# Altium PCB PCB_PAD_MB_2021-08-01.pcbdoc
Units mil, origin at the board's own origin, x right, y up, seen from the top; angles counter-clockwise.
Board outline 4865 x 4900 mil, 2 copper layers (Top Layer, Bottom Layer); 99 components, 75 nets, 466 pads, 240 vias.
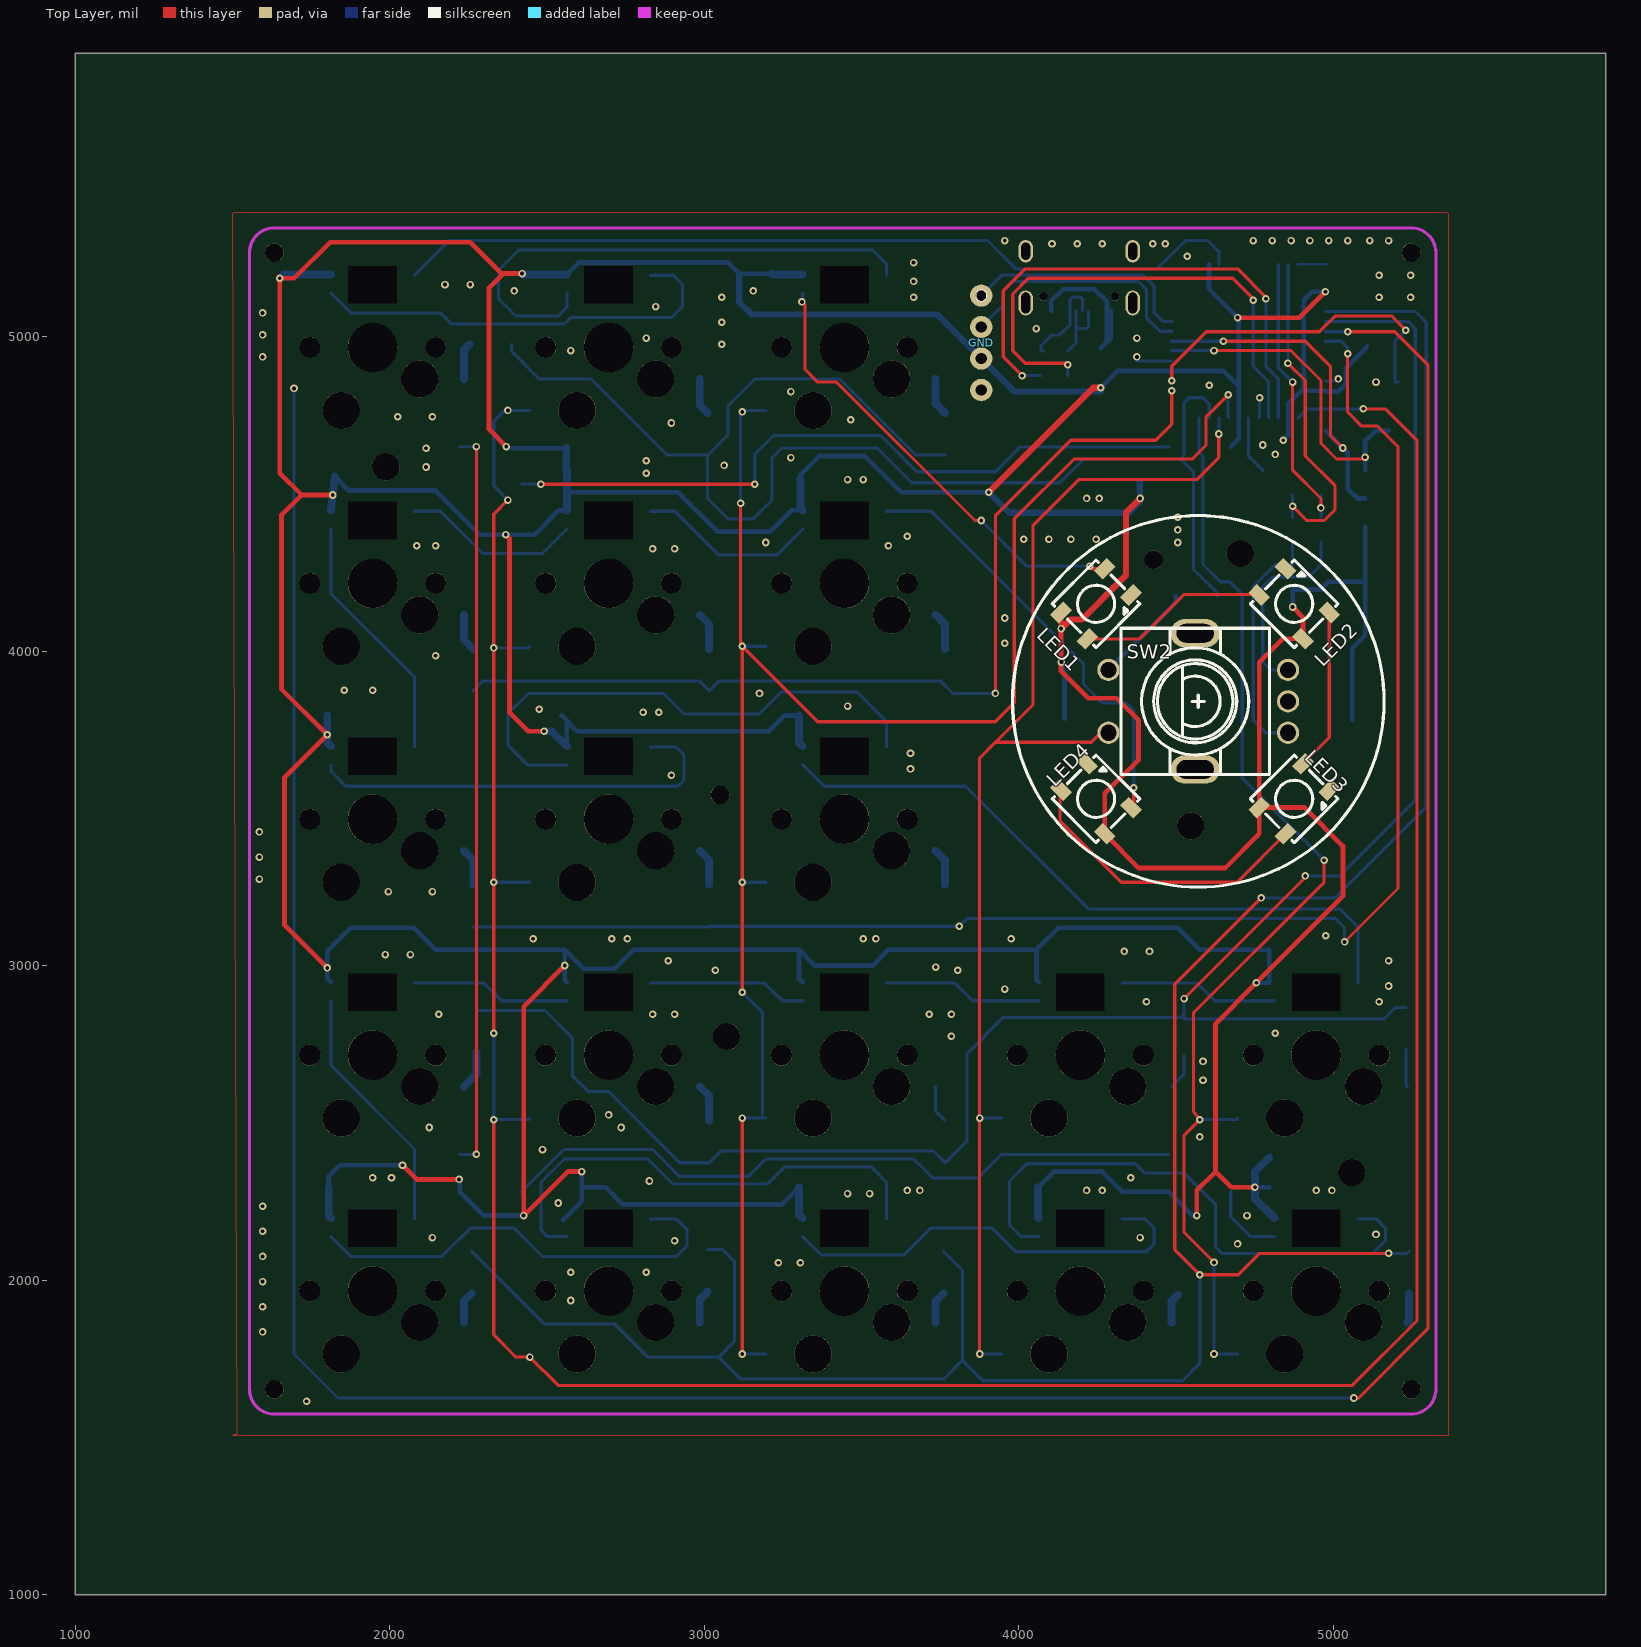
[diagram p0: Top Layer view]
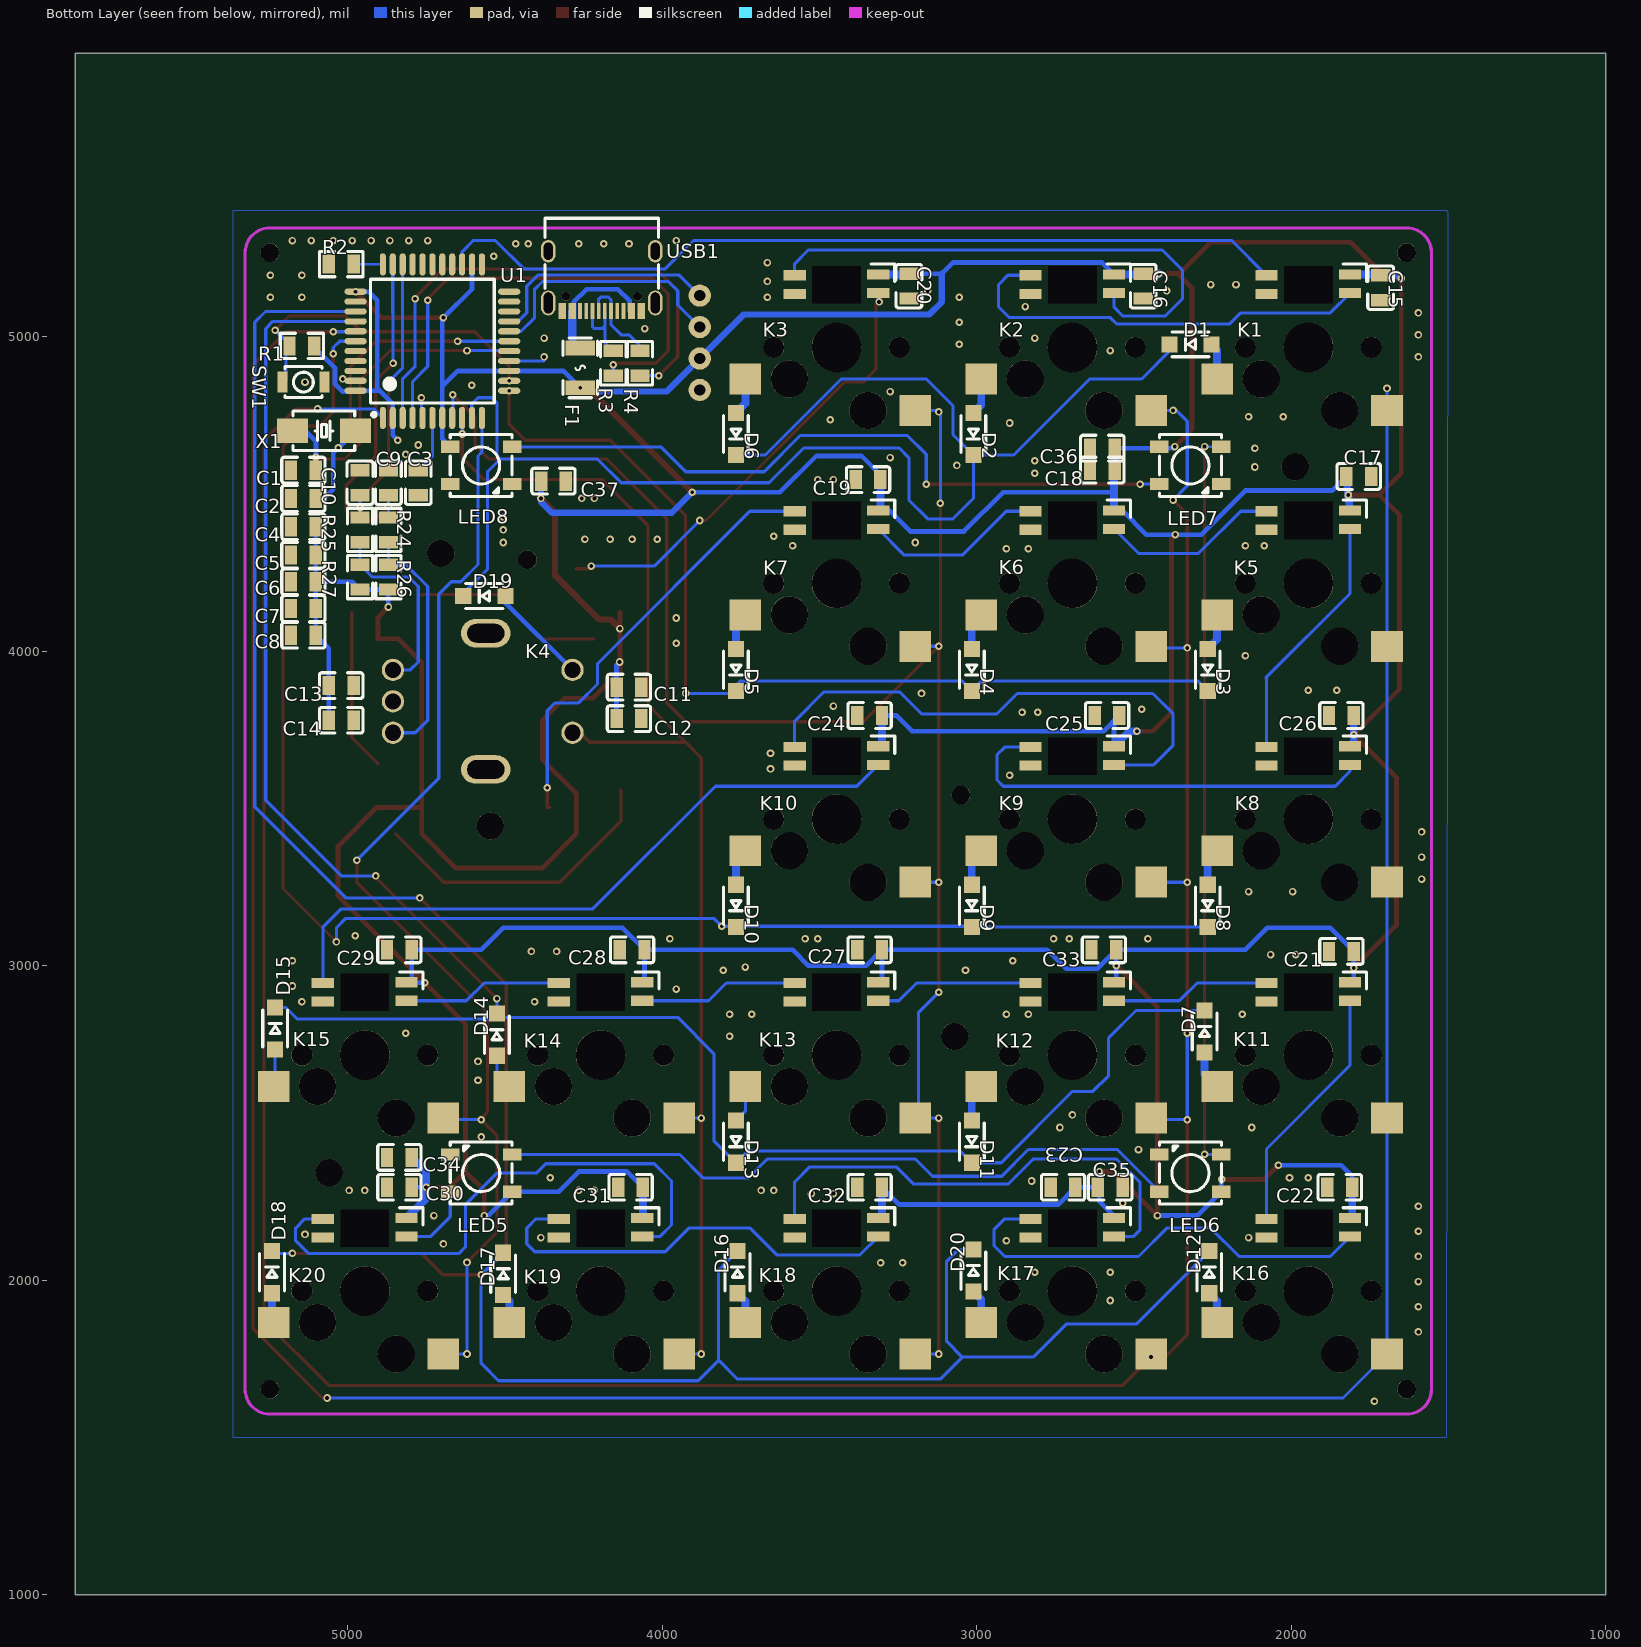
[diagram p1: Bottom Layer view, seen from below]

## Layer stack, top to bottom
Top Layer: signal copper (thickness not stored)
Dielectric: dielectric 12.6, FR-4, Dk 4.8
Bottom Layer: signal copper (thickness not stored)

## Board outline
5865,1000 1000,1000 1000,5900 5865,5900

## Components (designator, comment, footprint, x,y, rotation, side; value= is the part's Value field where it differs from the comment)
C1 "22pf" C0805 5140,4575 r0 bottom
C2 "22pf" C0805 5140,4485 r0 bottom
C3 "1u" C0805 4775,4535 r270 bottom
C4 "100nf" C0805 5140,4395 r0 bottom
C5 "100nf" C0805 5140,4305 r0 bottom
C6 "100nf" C0805 5140,4220 r0 bottom
C7 "100nf" C0805 5140,4135 r0 bottom
C8 "470nf" C0805 5140,4050 r0 bottom
C9 "10nf" C0805 4870,4535 r90 bottom
C10 "10nf" C0805 4960,4535 r90 bottom
C11 "0.1u" C0805 4105,3885 r0 bottom
C12 "0.1u" C0805 4105,3785 r0 bottom
C13 "0.1u" C0805 5020,3890 r0 bottom
C14 "0.1u" C0805 5020,3780 r0 bottom
C15 "0.1u" C0805 1715,5155 r90 bottom
C16 "0.1u" C0805 2470,5160 r90 bottom
C17 "0.1u" C0805 1785,4555 r0 bottom
C18 "0.1u" C0805 2600,4575 r180 bottom
C19 "0.1u" C0805 3345,4545 r180 bottom
C20 "0.1u" C0805 3215,5160 r90 bottom
C21 "0.1u" C0805 1840,3045 r180 bottom
C22 "0.1u" C0805 1845,2295 r180 bottom
C23 "0.1u" C0805 2725,2295 r180 bottom
C24 "0.1u" C0805 3340,3795 r180 bottom
C25 "0.1u" C0805 2585,3795 r180 bottom
C26 "0.1u" C0805 1840,3795 r180 bottom
C27 "0.1u" C0805 3340,3050 r180 bottom
C28 "0.1u" C0805 4095,3050 r180 bottom
C29 "0.1u" C0805 4835,3050 r180 bottom
C30 "0.1u" C0805 4835,2295 r180 bottom
C31 "0.1u" C0805 4100,2295 r180 bottom
C32 "0.1u" C0805 3340,2295 r180 bottom
C33 "0.1u" C0805 2595,3050 r180 bottom
C34 "0.1u" C0805 4835,2390 r180 bottom
C35 "0.1u" C0805 2575,2295 r0 bottom
C36 "0.1u" C0805 2600,4645 r180 bottom
C37 "0.1u" C0805 4345,4540 r0 bottom
D1 "1N4148W-C129216" SOD-123FL_L2.6-W1.6-LS3.4-RD 2320,4975 r180 bottom
D2 "1N4148W-C129216" SOD-123FL_L2.6-W1.6-LS3.4-RD 3010,4690 r90 bottom
D3 "1N4148W-C129216" SOD-123FL_L2.6-W1.6-LS3.4-RD 2265,3940 r90 bottom
D4 "1N4148W-C129216" SOD-123FL_L2.6-W1.6-LS3.4-RD 3015,3940 r90 bottom
D5 "1N4148W-C129216" SOD-123FL_L2.6-W1.6-LS3.4-RD 3765,3940 r90 bottom
D6 "1N4148W-C129216" SOD-123FL_L2.6-W1.6-LS3.4-RD 3765,4690 r90 bottom
D7 "1N4148W-C129216" SOD-123FL_L2.6-W1.6-LS3.4-RD 2275,2790 r270 bottom
D8 "1N4148W-C129216" SOD-123FL_L2.6-W1.6-LS3.4-RD 2265,3190 r90 bottom
D9 "1N4148W-C129216" SOD-123FL_L2.6-W1.6-LS3.4-RD 3015,3190 r90 bottom
D10 "1N4148W-C129216" SOD-123FL_L2.6-W1.6-LS3.4-RD 3765,3190 r90 bottom
D11 "1N4148W-C129216" SOD-123FL_L2.6-W1.6-LS3.4-RD 3015,2440 r90 bottom
D12 "1N4148W-C129216" SOD-123FL_L2.6-W1.6-LS3.4-RD 2260,2025 r270 bottom
D13 "1N4148W-C129216" SOD-123FL_L2.6-W1.6-LS3.4-RD 3765,2440 r90 bottom
D14 "1N4148W-C129216" SOD-123FL_L2.6-W1.6-LS3.4-RD 4525,2780 r270 bottom
D15 "1N4148W-C129216" SOD-123FL_L2.6-W1.6-LS3.4-RD 5230,2800 r270 bottom
D16 "1N4148W-C129216" SOD-123FL_L2.6-W1.6-LS3.4-RD 3760,2025 r270 bottom
D17 "1N4148W-C129216" SOD-123FL_L2.6-W1.6-LS3.4-RD 4505,2020 r270 bottom
D18 "1N4148W-C129216" SOD-123FL_L2.6-W1.6-LS3.4-RD 5240,2025 r270 bottom
D19 "1N4148W-C129216" SOD-123FL_L2.6-W1.6-LS3.4-RD 4565,4175 r180 bottom
D20 "1N4148W-C129216" SOD-123FL_L2.6-W1.6-LS3.4-RD 3010,2030 r270 bottom
F1 "SMD1206B200TF" F1206 4260,4900 r90 bottom
GND "A1WJUN_OLED-0.91" A1WJUN_OLED-0.91 3880,5130 r0 top
K1 "凯华KAILH热插拔底座 COPY" CHERRY_MX_热插拔_3528RGB(左入) 1945,4965 r0 top
K2 "凯华KAILH热插拔底座 COPY" CHERRY_MX_热插拔_3528RGB(左入) 2695,4965 r0 top
K3 "凯华KAILH热插拔底座 COPY" CHERRY_MX_热插拔_3528RGB(左入) 3445,4965 r0 top
K5 "凯华KAILH热插拔底座 COPY" CHERRY_MX_热插拔_3528RGB(左入) 1945,4215 r0 top
K6 "凯华KAILH热插拔底座 COPY" CHERRY_MX_热插拔_3528RGB(左入) 2695,4215 r0 top
K7 "凯华KAILH热插拔底座 COPY" CHERRY_MX_热插拔_3528RGB(左入) 3445,4215 r0 top
K8 "凯华KAILH热插拔底座 COPY" CHERRY_MX_热插拔_3528RGB(左入) 1945,3465 r0 top
K9 "凯华KAILH热插拔底座 COPY" CHERRY_MX_热插拔_3528RGB(左入) 2695,3465 r0 top
K10 "凯华KAILH热插拔底座 COPY" CHERRY_MX_热插拔_3528RGB(左入) 3445,3465 r0 top
K11 "凯华KAILH热插拔底座 COPY" CHERRY_MX_热插拔_3528RGB(左入) 1945,2715 r0 top
K12 "凯华KAILH热插拔底座 COPY" CHERRY_MX_热插拔_3528RGB(左入) 2695,2715 r0 top
K13 "凯华KAILH热插拔底座 COPY" CHERRY_MX_热插拔_3528RGB(左入) 3445,2715 r0 top
K14 "凯华KAILH热插拔底座 COPY" CHERRY_MX_热插拔_3528RGB(左入) 4195,2715 r0 top
K15 "凯华KAILH热插拔底座 COPY" CHERRY_MX_热插拔_3528RGB(左入) 4945,2715 r0 top
K16 "凯华KAILH热插拔底座 COPY" CHERRY_MX_热插拔_3528RGB(左入) 1945,1965 r0 top
K17 "凯华KAILH热插拔底座 COPY" CHERRY_MX_热插拔_3528RGB(左入) 2695,1965 r0 top
K18 "凯华KAILH热插拔底座 COPY" CHERRY_MX_热插拔_3528RGB(左入) 3445,1965 r0 top
K19 "凯华KAILH热插拔底座 COPY" CHERRY_MX_热插拔_3528RGB(左入) 4195,1965 r0 top
K20 "凯华KAILH热插拔底座 COPY" CHERRY_MX_热插拔_3528RGB(左入) 4945,1965 r0 top
LED1 "WS2812B" LED-SMD_4P-L5.0-W5.0-BL#1 4245,4150 r315 top
LED2 "WS2812B" LED-SMD_4P-L5.0-W5.0-BL#1 4875,4150 r45 top
LED3 "WS2812B" LED-SMD_4P-L5.0-W5.0-BL#1 4875,3530 r315 top
LED4 "WS2812B" LED-SMD_4P-L5.0-W5.0-BL#1 4245,3530 r45 top
LED5 "WS2812B" LED-SMD_4P-L5.0-W5.0-BL#2 4575,2340 r270 bottom
LED6 "WS2812B" LED-SMD_4P-L5.0-W5.0-BL#2 2320,2340 r270 bottom
LED7 "WS2812B" LED-SMD_4P-L5.0-W5.0-BL#2 2320,4590 r90 bottom
LED8 "WS2812B" LED-SMD_4P-L5.0-W5.0-BL#2 4575,4590 r90 bottom
R1 "10k" R0805 5145,4970 r0 bottom
R2 "1k" R0805 5020,5230 r180 bottom
R3 "22k" R0805 4155,4915 r270 bottom
R4 "22k" R0805 4070,4915 r270 bottom
R24 "10k" R0805 4870,4385 r90 bottom
R25 "10k" R0805 4960,4385 r90 bottom
R26 "10k" R0805 4870,4235 r90 bottom
R27 "10k" R0805 4960,4235 r270 bottom
SW1 "B3U-1000P" KEY-SMD_B3U-1000PM 5140,4855 r180 bottom
SW2 "K4" SW-TH_EC11E18244A5 4570,3840 r90 top
U1 "ATMEGA32U4-AU" QFP-44_L10.0-W10.0-P0.80-LS13.2-BL 4730,4985 r0 bottom
USB1 "KH-TYPE-C-16P-T" USB-C-SMD_KH-TYPE-C-16P 4191.53,5176.1 r180 bottom
X1 "16MHz" 5032 5075,4700 r180 bottom

## Footprints (in the part's own frame and the unit in brackets; to place one, negate y for a bottom-side part, rotate by r counter-clockwise, add the part's x,y. Pads: shape width x height; smd on the part's side, far side on the other; paste and mask are expansions set on the pad)
5032 [mm]
  rect 2.5x1.999 smd: 1(2.54,0) 2(-2.54,0)
  silkscreen extent -2.49,-1.6 2.49,1.6
A1WJUN_OLED-0.91 [mm]
  round 1.8 hole 0.91: 1(0,-7.62) 2(0,-5.08) 3(0,-2.54) 4(0,0)
  silkscreen extent -0.45,-0.45 0.45,0.45
C0805 [mm]
  rect 1x1.55 smd: 1(1,0) 2(-1,0)
  silkscreen extent -1.75,-1.04 1.75,1.04
CHERRY_MX_热插拔_3528RGB(左入) [mm]
  rect 1.8x0.82 smd far side: 1(3.385,4.33) 2(3.385,5.83) 3(-3.363,5.894) 4(-3.363,4.394)
  rect 2.55x2.5 smd far side: 5(-6.35,-5.08) 6(7.366,-2.54)
  round 1.7 hole 1.7 unplated: ""(-5.08,0) ""(5.08,0)
  round 3 hole 3 unplated: ""(-2.54,-5.08) ""(3.81,-2.54)
  round 4 hole 4 unplated: ""(0,0)
  Multi-Layer board cut-out: -1.95,6.58 1.95,6.58 1.95,3.58 -1.95,3.58
F1206 [mm]
  rect 1.2x2.4 smd: 1(1.6,0) 2(-1.6,0)
  silkscreen extent -2.41,-1.4 2.41,1.4
KEY-SMD_B3U-1000PM [mm]
  rect 0.8x1.7 smd: 1(1.7,0) 2(-1.7,0)
  silkscreen extent -1.5,-1.25 1.5,1.25
LED-SMD_4P-L5.0-W5.0-BL#1 [mm]
  rect 1x1.5 smd: 1(-1.5,-2.5) 2(1.5,-2.5) 3(1.5,2.5) 4(-1.5,2.5)
  silkscreen extent -2.5,-2.5 2.5,2.5
LED-SMD_4P-L5.0-W5.0-BL#2 [mm]
  rect 1x1.5 smd: 1(1.5,2.5) 2(-1.5,2.5) 3(-1.5,-2.5) 4(1.5,-2.5)
  silkscreen extent -2.5,-2.5 2.5,2.5
QFP-44_L10.0-W10.0-P0.80-LS13.2-BL [mm]
  oval 0.5x1.8 smd: 1(4,6.2) 2(3.2,6.2) 3(2.4,6.2) 4(1.6,6.2) 5(0.8,6.2) 6(0,6.2) 7(-0.8,6.2) 8(-1.6,6.2) 9(-2.4,6.2) 10(-3.2,6.2) 11(-4,6.2) 23(-4,-6.2) 24(-3.2,-6.2) 25(-2.4,-6.2) 26(-1.6,-6.2) 27(-0.8,-6.2) 28(0,-6.2) 29(0.8,-6.2) 30(1.6,-6.2) 31(2.4,-6.2) 32(3.2,-6.2) 33(4,-6.2)
  oval 1.8x0.5 smd: 12(-6.2,4) 13(-6.2,3.2) 14(-6.2,2.4) 15(-6.2,1.6) 16(-6.2,0.8) 17(-6.2,0) 18(-6.2,-0.8) 19(-6.2,-1.6) 20(-6.2,-2.4) 21(-6.2,-3.2) 22(-6.2,-4) 34(6.2,-4) 35(6.2,-3.2) 36(6.2,-2.4) 37(6.2,-1.6) 38(6.2,-0.8) 39(6.2,0) 40(6.2,0.8) 41(6.2,1.6) 42(6.2,2.4) 43(6.2,3.2) 44(6.2,4)
  silkscreen extent -5,-5 5,6.08
R0805 [mm]
  rect 1x1.55 smd: 1(1,0) 2(-1,0)
  silkscreen extent -1.75,-1.02 1.75,1.02
SOD-123FL_L2.6-W1.6-LS3.4-RD [mm]
  rect 1.3x1.3 smd: 1(-1.7,0) 2(1.7,0)
  silkscreen extent -1.5,-1 1.5,1
SW-TH_EC11E18244A5 [mm]
  oval 2.3x4 hole 1.5 slot 3 at 90 deg: 6(5.5,0.25) 7(-5.5,0.25)
  round 1.8 hole 1.3: A(-2.54,-7.25) B(2.54,-7.25) C(0,-7.25) D(-2.54,7.25) E(2.54,7.25)
  silkscreen extent -5.9,-5.75 5.9,6.25
USB-C-SMD_KH-TYPE-C-16P [mm]
  oval 1.2x2 hole 0.7 slot 1.7 at 90 deg: 1(4.32,-1.765) 2(-4.32,-1.765)
  oval 1.2x1.8 hole 0.7 slot 1.4 at 90 deg: 3(4.32,2.415) 4(-4.32,2.415)
  rect 0.3x1.3 smd: A1(3.35,-2.415) A4(2.55,-2.415) A5(1.25,-2.415) A6(0.25,-2.415) A7(-0.25,-2.415) A8(-1.25,-2.415) A9(-2.55,-2.415) A12(-3.35,-2.415) B1(-3.05,-2.415) B4(-2.25,-2.415) B5(-1.75,-2.415) B6(-0.75,-2.415) B7(0.75,-2.415) B8(1.75,-2.415) B9(2.25,-2.415) B12(3.05,-2.415)
  round 0.7 hole 0.7 unplated: ""(-2.89,-1.235) ""(2.89,-1.235)
  silkscreen extent -4.57,-0.57 4.57,5.08

## Free pads (board coordinates)
  rect 59.05x39.37 smd far side: 1(1695,4765)
  round 59.06 hole 59.06 unplated: ""(1632.48,1652.48) ""(1632.48,5266.65) ""(3049.8,3542.24) ""(4427.76,4290.28) ""(5246.65,1652.48) ""(5246.65,5266.65)
  round 86.61 hole 86.61 unplated: ""(1986.81,4585.55) ""(3069.49,2774.53) ""(4545.87,3443.82) ""(4703.35,4309.96) ""(5057.68,2341.46)

## Via types
v1: diameter 24, hole 12, Top Layer to Bottom Layer, 240 vias

## Nets (pads, with @x,y where several pads share a name; then routed paths per layer and width w, separated by ;. In a path a pad name is that pad's centre, name@x,y a point inside that pad or via, vN(x,y) a via of type N, cw(c..) or ccw(c..) an arc to the next point about the centre after c; other vN are vias at no path point)
C1: K1.5 K5.5 K8.5 K11.5 K16.5 pad.1 U1.38 | length 10259.1
  Top Layer w10: v1(5045,5015) 5195,5015 5300,4910 5300,1845 5080,1625 v1(5065,1625)
  Bottom Layer w10: v1(1695,4835) 1695,4775 K5.5 K8.5 K11.5 K16.5 1835,1625 v1(5065,1625) ; U1.38 4975.59,5015 v1(5045,5015)
C1_2: C1.2 U1.16 X1.2 | length 1061
  Top Layer w10: v1(4620,4955) 4865,4955 4960,4860 4960,4660 5009.65,4610.35 5100.35,4610.35 v1@5100.35,4615.94
  Bottom Layer w10: U1.16 4485.9,4955 v1(4620,4955)
  Bottom Layer w15: C1.2 5100.09,4652.1 5100,4665 5135,4700 X1.2
  other v1: 5100.35,4615.94
C2: K2.5 K6.5 K9.5 K12.5 K17.5 U1.1 | length 9747.7
  Top Layer w10: v1(2330,2510) 2330,1825.7 2400.7,1755 v1(2445,1755) 2535,1665 5060,1665 5265,1870 5265,4670 5165,4770 v1(5095,4770) ; v1(2330,2785) v1(2330,3265) v1(2330,4010) 2330,4435 v1(2375,4480)
  Bottom Layer w10: v1(2330,2785) v1(2330,2510) 2440,2510 K12.5 ; v1(2330,3265) K9.5 ; v1(2330,4010) 2440,4010 K6.5 ; v1(2375,4480) 2330,4525 2330,4730 2365,4765 v1(2375,4765) K2.5 ; v1(2445,1755) K17.5 ; U1.1 4916.57,4770 v1(5095,4770)
C2_2: C2.2 U1.17 X1.1 | length 1095.3
  Top Layer w10: v1(4650,4985) 4910,4985 4990,4905 4990,4685 v1(5029.61,4645.39)
  Bottom Layer w10: U1.17 v1(4650,4985)
  Bottom Layer w15: X1.1 v1(5029.61,4645.39) 5045,4630 5045,4559.13 5045,4515 5075,4485 C2.2
C3: K3.5 K7.5 K10.5 K13.5 K18.5 U1.8 | length 5968.7
  Top Layer w10: v1(3115,4470) 3115,4020 v1(3120,4015) 3360,3775 3925,3775 3985,3835 3985,4420 4175,4610 4550,4610 4595,4655 4595,4745 v1(4665,4815) ; v1(3120,1765) v1(3120,2515) ; v1(3120,2915) v1(3120,3265) v1@3120,4025
  Bottom Layer w10: v1(3115,4470) 3115,4755 v1(3120,4760) 3125,4765 K3.5 ; v1(3120,1765) K18.5 ; v1(3120,2515) K13.5 3185,2515 3185,2850 v1(3120,2915) ; v1(3120,3265) K10.5 ; v1(3120,4015) K7.5 ; v1(4665,4815) 4665,4742.92 U1.8
C3_2: C3.2 U1.6 | length 185.2
  Bottom Layer w10: U1.6 4730,4619.37 C3.2
C4: K14.5 K19.5 SW2.D U1.9 | length 4030.9
  Top Layer w10: v1(3875,1765) v1@3875,2520 ; v1(3875,2515) 3875,3660 3925,3710 4230,3710 4260,3740 SW2.D ; 3922.5,3707.5 4045,3830 4045,4400 4190,4545 4565,4545 4635,4615 v1(4635,4690)
  Bottom Layer w10: v1(3875,1765) K19.5 ; v1(3875,2515) K14.5 ; v1(4635,4690) U1.9
C5: K15.5 K20.5 U1.11 | length 3597.1
  Top Layer w10: v1(4620,2056.28) 4525,2151.3 4525,2460 v1(4575,2510) 4555,2535 4555,2850 4970,3265 v1(4970,3335)
  Bottom Layer w10: U1.11 4572.5,4632.5 4585,4620 4585,4275 4640,4220 4670,4220 4710,4180 4710,3595 v1(4970,3335) ; v1(4575,2510) 4695,2510 K15.5 ; v1(4620,2056.28) v1(4620,1765) K20.5
C9_2: C9.2 R24.1 U1.32 | length 1080.6
  Top Layer w10: v1(4855,4915) 4910,4860 4910,4620 5005,4525 5005,4450 4970,4415 4915,4415 v1(4870,4460)
  Bottom Layer w10: v1(4855,4915) U1.32 ; R24.1 v1(4870,4460) C9.2
C10_2: C10.2 R25.1 U1.31 | length 901.5
  Top Layer w10: v1(4870,4855) 4870,4575 4960,4485 v1(4960,4455)
  Bottom Layer w10: U1.31 4824.49,4900.51 v1(4870,4855) ; R25.1 C10.2
D1_2: D1.2 K1.6 | length 117.5
  Bottom Layer w25: K1.6 2235,4956.93 D1.2
D2_2: D2.2 K2.6 | length 236.9
  Bottom Layer w10: K2.6 2985,4781.93 D2.2
  Bottom Layer w25: K2.6 2985,4781.93 D2.2
D3_2: D3.2 K5.6 | length 120.5
  Bottom Layer w25: K5.6 2235,4036.93 D3.2
D4_2: D4.2 K6.6 | length 120.5
  Bottom Layer w25: K6.6 3015,4085 D4.2
D5_2: D5.2 K7.6 | length 120.5
  Bottom Layer w25: K7.6 3765,4085 D5.2
D8_2: D8.2 K8.6 | length 120.5
  Bottom Layer w25: K8.6 2265,3335 D8.2
D9_2: D9.2 K9.6 | length 120.5
  Bottom Layer w25: K9.6 3015,3335 D9.2
D10_2: D10.2 K10.6 | length 120.5
  Bottom Layer w25: K10.6 3765,3335 D10.2
D13_2: D13.2 K13.6 | length 120.5
  Bottom Layer w10: K13.6 3735,2536.93 D13.2
D14_2: D14.2 K14.6 | length 114.6
  Bottom Layer w10: K14.6 4525,2655 D14.2
D15_2: D15.2 K15.6 | length 120.1
  Bottom Layer w10: D15.2 5230,2620 K15.6
D16_2: D16.2 K18.6 | length 103.4
  Bottom Layer w25: K18.6 3735,1933.07 D16.2
D17_2: D17.2 K19.6 | length 96.4
  Bottom Layer w25: K19.6 4485,1933.07 D17.2
D18_2: D18.2 K20.6 | length 95.1
  Bottom Layer w25: K20.6 5240,1870 D18.2
D+: R3.1 U1.4 | length 1619.6
  Top Layer w10: v1(4155,4910) 4150,4915 4020,4915 3980,4955 3980,5135 4030,5185 4680,5185 4745,5120 v1(4745,5115)
  Bottom Layer w10: R3.1 v1(4155,4910) ; v1(4745,5115) 4745,4905 4792.99,4857.01 U1.4
D-: R4.1 U1.3 | length 1656.6
  Top Layer w10: v1(4010,4875) 3950,4935 3950,5145 4020,5215 4695,5215 4785,5125 v1(4785,5120)
  Bottom Layer w10: v1(4010,4875) R4.1 ; v1(4785,5120) 4785,4905 4824.49,4865.51 U1.3
DI+: R3.2 USB1.A6 USB1.B6 | length 280.7
  Bottom Layer w10: R3.2 4181.7,4981.07 USB1.A6 4181.7,5033.3 4190,5025 4215,5025 4221.07,5031.07 USB1.B6
DI-: R4.2 USB1.A7 USB1.B7 | length 307.7
  Bottom Layer w10: R4.2 4070,4970 4105,5005 4130,5005 4162,5037 USB1.B7 4162.01,5117.01 4170,5125 4195,5125 4201.38,5118.62 USB1.A7 ; R4.2 R4.2@4079.4,4954.4
EC11A: R24.2 R26.1 SW2.A | length 777
  Bottom Layer w10: SW2.A 4785,3740 4745,3780 4745,4205 4814.4,4274.4 R26.1 ; R26.1 R24.2
EC11B: R25.2 R27.2 SW2.B | length 615.8
  Bottom Layer w10: SW2.B 4800,3940 4775,3965 4775,4205 4805,4235 4920.6,4235 R27.2 ; R27.2 R25.2
GND: C1.1 C2.1 C3.1 C4.1 C5.1 C6.1 C7.1 C8.1 C9.1 C10.1 C11.2 C12.2 C13.2 C14.2 C15.2 C16.2 C17.2 C18.2 C19.2 C20.2 C21.2 C22.2 C23.2 C24.2 C25.2 C26.2 C27.2 C28.2 C29.2 C30.2 C31.2 C32.2 C33.2 C34.2 C35.2 C36.2 C37.2 GND.1 K1.1 K2.1 K3.1 K5.1 K6.1 K7.1 K8.1 K9.1 K10.1 K11.1 K12.1 K13.1 K14.1 K15.1 K16.1 K17.1 K18.1 K19.1 K20.1 LED1.3 LED2.3 LED3.3 LED4.3 LED5.3 LED6.3 LED7.3 LED8.3 R2.2 SW1.1 SW2.C U1.5 U1.15 U1.23 U1.35 U1.43 USB1.A1 USB1.A12 USB1.B1 USB1.B12 | length 232.8
  Bottom Layer w10: v1(4375,4935) 4375,4922 U1.15 ; U1.5 4765,4744.41 v1(4765,4805) ; U1.43 5009.02,4859.02 v1(5015,4865)
  other v1: 1735,1615 1595,1835 1595,1915 2575,1935 1595,1995 2575,2025 2815,2025 3235,2055 3305,2055 1595,2075 4695,2115 2905,2125 2135,2135 4385,2135 5135,2145 1595,2155 4725,2205 1595,2235 2535,2245 3455,2275 3525,2275 3645,2285 3685,2285 4215,2285 4265,2285 4945,2285 4995,2285 2825,2315 1945,2325 2005,2325 4355,2325 2485,2415 4575,2455 2125,2485 2735,2485 2695,2525 4585,2635 4585,2695 3785,2775 4815,2785 2155,2845 2835,2845 2905,2845 3715,2845 3785,2845 4405,2885 5145,2885 3955,2925 5175,2935 3035,2985 3805,2985 3735,2995 2885,3015 5175,3015 1985,3035 2065,3035 4335,3045 4415,3045 2455,3085 2705,3085 2755,3085 3505,3085 3545,3085 3975,3085 4975,3095 1995,3235 2135,3235 1585,3275 1585,3345 1585,3425 2895,3605 3655,3625 3655,3675 2805,3805 2855,3805 2475,3815 3455,3825 3175,3865 1855,3875 1945,3875 2145,3985 3955,4025 3955,4105 2835,4325 2905,4325 2085,4335 2145,4335 3585,4335 3195,4345 4505,4345 4015,4355 4095,4355 4165,4355 4245,4355 3645,4365 4505,4385 4505,4425 4215,4485 4255,4485 3455,4545 3505,4545 2815,4565 2115,4585 3062.22,4590 2815,4605 3275,4615 4815,4625 2115,4645 4775,4655 2895,4725 3465,4735 2025,4745 2135,4745 3275,4825 4605,4845 5135,4855 1595,4935 2575,4955 3055,4975 2815,4995 4375,4995 1595,5005 4055,5025 3055,5045 1595,5075 2845,5095 3055,5125 3665,5125 5145,5125 5245,5125 2395,5145 3155,5145 2175,5165 2255,5165 3665,5175 5145,5195 5245,5195 3665,5235 4535,5255 4105,5295 4185,5295 4265,5295 4425,5295 4465,5295 3955,5305 4745,5305 4805,5305 4865,5305 4925,5305 4985,5305 5045,5305 5115,5305 5175,5305
K3_6: D6.2 K3.6 | length 241
  Bottom Layer w10: K3.6 3735,4786.93 D6.2
  Bottom Layer w25: K3.6 3735,4786.93 D6.2
K11_6: D7.2 K11.6 | length 124.6
  Bottom Layer w25: K11.6 2275,2655 D7.2
K12_6: D11.2 K12.6 | length 241
  Bottom Layer w10: K12.6 3015,2585 D11.2
  Bottom Layer w25: K12.6 3015,2585 D11.2
K16_6: D12.2 K16.6 | length 103.4
  Bottom Layer w25: K16.6 2235,1933.07 D12.2
K17_6: D20.2 K17.6 | length 108.4
  Bottom Layer w25: K17.6 2985,1938.07 D20.2
LED1_2: LED1.2 LED2.4 | length 605.9
  Top Layer w10: LED1.2 4383.65,4038.65 4525,4180 4761.49,4180 LED2.4
LED2_2: LED2.2 LED3.4 | length 515.4
  Top Layer w10: LED3.4 4986.35,3724.86 LED2.2
LED3_2: LED3.2 LED4.4 | length 961
  Top Layer w10: LED4.4@4133.7,3557.8 4130,3554.2 4130,3460 4325,3265 4693.6,3265 LED3.2
LED6_4: LED5.2 LED6.4 | length 2227.3
  Bottom Layer w10: LED6.4@2418.4,2280.9 2552.5,2415 2835,2415 2920,2330 3140,2330 3195,2385 3665,2385 3725,2325 3870,2325 3944,2399.1 LED5.2@4476.6,2399.1
LED7_4: LED6.2 LED7.4 | length 2356.8
  Top Layer w10: v1(2275,2400) v1(2275,4650)
  Bottom Layer w10: LED6.2@2221.6,2399.1 v1(2275,2400) ; LED7.4@2221.6,4649.1 v1(2275,4650)
LED8_4: LED7.2 LED8.4 | length 2258.5
  Top Layer w10: v1(2480,4530) v1(3160,4530)
  Bottom Layer w10: LED7.2@2418.4,4530.9 v1(2480,4530) ; v1(3160,4530) 3160,4625 3220,4685 3560,4685 3675,4570 3925,4570 4004.1,4649.1 LED8.4@4476.6,4649.1
R1: D1.1 D2.1 D6.1 D19.1 U1.10 | length 4515.1
  Bottom Layer w10: D1.1 2386.93,4953.07 2475,4865 2640,4865 2881.93,4623.07 D2.1 ; D6.1 3671.9,4623.1 3430,4865 3160,4865 3075,4780 3075,4688.1 D2.1 3010,4485 3075,4420 3155,4420 3215,4480 3215,4615 3245,4645 3550,4645 3660,4535 4130,4535 4205,4610 4515,4610 ; U1.10 4605,4785 4585,4805 4540,4805 4525,4790 4525,4623.9 4515,4610 ; D19.1 4631.9,4183.1 4555,4260 4555,4570 4515,4610
R1_1: R1.1 SW1.2 U1.13 | length 1066.9
  Top Layer w10: v1(4485.91,4859.02) 4485.9,4905.9 4595,5015 4955,5015 5005,5065 5185,5065 v1(5230,5020)
  Bottom Layer w10: SW1.2 5195,4855 5195,4985 v1(5230,5020)
R2: D3.1 D4.1 D5.1 U1.12 | length 3069.3
  Top Layer w10: v1(3925,3865) 3925,4430 4165,4670 4435,4670 4485.9,4720.9 v1(4485.91,4827.52)
  Bottom Layer w10: D3.1 2296.93,3905 2983.07,3905 D4.1 ; D4.1@3015,3873 3046.93,3905 3750,3905 3790,3865 v1(3925,3865)
R2_1: R2.1 U1.33 | length 93.1
  Bottom Layer w10: U1.33 R2.1
R3: D8.1 D9.1 D10.1 U1.39 | length 4974.6
  Top Layer w10: v1(5035,3075) 5205,3245 5205,4650 5140,4715 5090,4715 5045,4760 v1(5045,4945)
  Bottom Layer w10: D8.1 D9.1 ; D9.1@3015,3123 3016.93,3125 D10.1@3765,3125 ; D10.1 3766.93,3125 v1(3810,3125) 3835,3150 5005,3150 5035,3120 v1(5035,3075) ; U1.39 5025,4985 5045,4965 v1(5045,4945)
R4: D7.1 D11.1 D13.1 D14.1 D15.1 U1.37 | length 6538.6
  Top Layer w10: v1(4525,2895) 4910,3280 v1(4910,3285)
  Bottom Layer w10: D7.1 2493.1,2856.9 2580,2770 2580,2650 2630,2600 2695,2600 2921.9,2373.1 D11.1 ; D11.1 3051.93,2410 3728.07,2410 D13.1 ; D13.1 3835,2443.1 3835,2720 3950,2835 4515,2835 4525,2845 v1(4525,2895) 4525,2830 5160,2830 5196.9,2866.9 D15.1 ; v1(4910,3285) 5020,3285 5260,3525 5260,5025 5237,5048 U1.37
R5: D12.1 D16.1 D17.1 D18.1 D20.1 U1.36 | length 8298.3
  Top Layer w10: v1(4575,2016.93) 4495,2096.9 4495,2940 v1(4770,3215) ; v1(4575,2016.93) 4696.93,2016.93 4765,2085 v1(5175,2085)
  Bottom Layer w10: D12.1 2491.9,1860 2715,1860 2820,1755 3045,1755 ; D20.1 3058.1,2096.9 3095,2060 3095,1805 3045,1755 ; D16.1 3820,2031.9 3820,1745 ; D17.1 v1(4575,2016.93) ; v1(4575,2016.93) 4575,1735 4520,1680 3885,1680 3820,1745 ; v1(4770,3215) 5005,3215 5295,3505 5295,5045 5260.5,5079.5 U1.36 ; v1(5175,2085) 5233.07,2085 D18.1 ; 3045,1755 3115,1685 3760,1685 3820,1745
RGB: K1.2 U1.25 | length 2732.7
  Bottom Layer w10: K1.2 2188.7,5305 3900,5305 3990,5215 4440,5215 4530,5305 4600,5305 4635.5,5269.5 U1.25
S1: K1.4 K2.2 | length 1364.7
  Bottom Layer w10: K1.4 1875.6,5075 2160,5075 2195,5040 2555,5040 2575,5060 2895,5060 2930,5095 2930,5165 2900.5,5194.5 K2.2
S2: K2.4 K3.2 | length 1702.6
  Bottom Layer w10: K2.4 2562.6,5092.6 2535,5065 2400,5065 2345,5120 2345,5210 2410,5275 3535,5275 3578.3,5231.7 K3.2
S3: K3.4 LED1.4 | length 1463.5
  Top Layer w10: v1(3310,5110) 3320,5100 3320,4895 3360,4855 3420,4855 3860,4415 v1(3880,4415) ; v1(4225,4270) 4233.65,4261.35 LED1.4
  Bottom Layer w10: v1(3310,5110) 3312.6,5112.6 K3.4 ; v1(3880,4415) 4025,4270 v1(4225,4270)
S4: K7.2 LED4.2 | length 1404.1
  Top Layer w10: LED4.2@4356.3,3502.2 4365,3502.2 v1(4365,3565)
  Bottom Layer w10: K7.2 3720.47,4444.53 4205,3960 4205,3895 4265,3835 4340,3835 4365,3810 v1(4365,3565)
S5: K6.2 K7.4 | length 576.5
  Bottom Layer w10: K6.2 2905.5,4444.5 3045,4305 3229.6,4305 K7.4
S6: K5.2 K6.4 | length 572.3
  Bottom Layer w10: K5.2 2160.5,4444.5 2295,4310 2484.6,4310 K6.4
S7: K5.4 K8.2 | length 804.9
  Bottom Layer w10: K5.4 1812.6,4182.4 2080,3915 2078.27,3913.27 K8.2
S8: K8.4 K9.2 | length 1367.8
  Bottom Layer w10: K8.4 1812.6,3617.4 1860,3570 2915,3570 2935,3590 2935,3670 2910.5,3694.5 K9.2
S9: K9.4 K10.2 | length 1720.3
  Bottom Layer w10: K9.4 2437,3638 2375,3700 2375,3800 2440,3865 2870,3865 2935,3800 3175,3800 3245,3870 3485,3870 3578.3,3776.7 K10.2
S10: K10.4 K15.2 | length 2156.8
  Bottom Layer w10: K10.4 3380.6,3570 3830,3570 4220,3180 5020,3180 5078.3,3121.7 K15.2
S11: K14.2 K15.4 | length 507.7
  Bottom Layer w10: K14.2 4565.47,2944.53 4622,2888 K15.4
S12: K13.2 K14.4 | length 507.7
  Bottom Layer w10: K13.2 3795.47,2944.53 3852,2888 K14.4
S13: K12.2 K13.4 | length 507.7
  Bottom Layer w10: K12.2 3190.5,2944.5 3247,2888 K13.4
S14: K11.2 K12.4 | length 507.7
  Bottom Layer w10: K11.2 2298.47,2944.53 2355,2888 K12.4
S15: K11.4 K16.2 | length 803.5
  Bottom Layer w10: K11.4 1812.6,2682.4 2078.27,2416.73 K16.2
S16: K16.4 K17.2 | length 1428.5
  Bottom Layer w10: K16.4 1875.6,2075 2165,2075 2255,2165 2395,2165 2485,2075 2910,2075 2945,2110 2945,2160 2910.5,2194.5 K17.2
S17: K17.4 K18.2 | length 1564.2
  Bottom Layer w10: K17.4 2502,2138 2480,2160 2480,2310 2555,2385 2820,2385 2900,2305 3200,2305 3255,2360 3530,2360 3578.3,2311.7 K18.2
S18: K18.4 K19.2 | length 1382
  Bottom Layer w10: K18.4 3370.6,2080 3635,2080 3720,2165 3915,2165 3990,2090 4405,2090 4430,2115 4430,2165 4400.47,2194.53 K19.2
S19: K19.4 K20.2 | length 1818.3
  Bottom Layer w10: K19.4 4007,2138 3970,2175 3970,2315 4025,2370 4370,2370 4400,2340 4525,2340 4625,2240 4625,2105 4645,2085 4690.6,2085 5125,2085 5165,2125 5165,2165 5135.5,2194.5 K20.2
S20: K20.4 LED5.4 | length 244.9
  Bottom Layer w10: LED5.4 4673.43,2201.57 4737,2138 K20.4
SCL: GND.3 U1.18 | length 810.7
  Bottom Layer w10: GND.3 3950,5100 3950,5145 3980,5175 4380,5175 4405,5150 4405,5060 4448.5,5016.5 U1.18
SDA: GND.4 U1.19 | length 743.5
  Bottom Layer w10: GND.4 3945,5195 4395,5195 4430,5160 4430,5075 4457,5048 U1.19
SW2_E: D19.2 SW2.E | length 323.4
  Bottom Layer w15: SW2.E 4498.07,4153.49 D19.2
VCC: C4.2 C5.2 C6.2 C7.2 C8.2 C11.1 C12.1 C13.1 C14.1 C15.1 C16.1 C17.1 C18.1 C19.1 C20.1 C21.1 C22.1 C23.1 C24.1 C25.1 C26.1 C27.1 C28.1 C29.1 C30.1 C31.1 C32.1 C33.1 C34.1 C35.1 C36.1 C37.1 F1.2 GND.2 K1.3 K2.3 K3.3 K5.3 K6.3 K7.3 K8.3 K9.3 K10.3 K11.3 K12.3 K13.3 K14.3 K15.3 K16.3 K17.3 K18.3 K19.3 K20.3 LED1.1 LED2.1 LED3.1 LED4.1 LED5.1 LED6.1 LED7.1 LED8.1 R1.2 R26.2 R27.1 U1.2 U1.7 U1.14 U1.24 U1.34 U1.44 | length 28436.7
  Top Layer w15: 1719,4496 1655,4432.1 1655,3879.2 v1(1800.63,3733.59) 1665,3598 1665,3127.9 v1@1800.6,2992.3 ; v1(1818.16,4496.03) 1718.97,4496.03 1650,4565 v1(1650,5185) 1695,5185 1810,5300 2255,5300 2355,5200 2360,5200 ; v1(2040,2365) 2085,2320 v1(2220,2320) ; v1(2368.47,4370) 2380,4358.47 2380,3805 2440,3745 v1(2490,3745) ; v1(2370,4650) 2315,4705 2315,5155 2360,5200 ; v1(2420,5200) 2360,5200 ; v1(2555.63,3000.17) 2425,2869.54 2425,2430 v1(2425,2205) 2565,2345 v1(2610,2345) ; LED1.1 4133.65,4071.45 4133.65,3936.35 4220,3850 4310,3850 4380,3780 4380,3655 4272.84,3547.84 LED4.1 ; LED4.1 4381.4,3310 4655,3310 4763.7,3418.7 4763.7,3502.2 4763.7,3963.7 4838.7,4038.6 LED2.1 ; v1(4565,2205) 4565,2285 4625,2345 ; v1(4695,5060) 4891.61,5060 v1(4974.09,5142.48) ; v1(4750,2295) 4675,2295 4625,2345 ; LED3.1 4907.84,3502.16 5030,3380 5030,3220 v1(4755,2945) 4625,2815 4625,2345 ; v1(4870,4140) 4902.84,4107.16 LED2.1
  Top Layer w20: v1(3904.18,4505) 4236.19,4837.01 v1(4260,4837.01) ; v1@4133.7,4071.5 4162.2,4100 4200,4100 4340,4240 4340,4440 v1(4385,4485)
  Bottom Layer w10: v1(1650,5185) 1662.05,5197.05 K1.3@1812.6,5197.05
  Bottom Layer w15: C22.1 1805,2330 1840,2365 v1(2040,2365) ; K11.3 1800.63,2959.02 1800.63,2992.25 C21.1 1875.63,3120 2075,3120 2145,3050 C33.1 ; C17.1 1869.4,4510 2145,4510 2285,4370 v1(2368.47,4370) ; v1(2220,2320) 2221.57,2318.43 LED6.1 2297.52,2205 v1(2425,2205) ; v1(2368.47,4370) 2460,4370 2537.05,4447.05 K6.3 ; v1(2370,4650) 2375,4645 C36.1 ; K17.3@2550,2190 2610,2250 v1(2610,2345) 2610,2295 C23.1 2740.63,2240 3245.63,2240 C32.1 ; K12.3 2555.63,2954.02 v1(2555.63,3000.17) C33.1 ; K9.3 2562.6,3778.03 C25.1 2595.63,3745 3205,3745 3255,3795 C24.1 ; K6.3@2562.6,4447.1 2562.6,4505 2915,4505 3040,4380 3210,4380 3277.1,4447.1 K7.3@3312.6,4447.1 ; K2.3 2600.55,5235 3075,5235 3110.63,5199.37 C20.1 ; C19.1 3305.63,4560.63 3365,4620 3510,4620 3625,4505 v1(3904.18,4505) ; K13.3 3300.63,2959.02 C27.1 ; C31.1 4110.6,2345 4265,2345 4329,2280.9 4418.33,2280.9 LED5.1@4476.6,2280.9 ; K14.3 4055.63,2954.02 C28.1 ; v1(4135,3965) 4144.37,3955.63 C12.1 ; v1(4260,4837.01) 4313.5,4890.51 U1.14 4649.49,4890.51 4698.5,4841.5 ; LED5.1 4552.52,2205 v1(4565,2205) ; U1.24 4604.02,5150.98 v1(4695,5060) 4698.5,5056.5 4698.5,4841.5 ; LED8.1 4698.5,4674.12 U1.7 4698.5,4841.5 ; v1(4750,2295) C30.1 ; v1(4755,2945) 4795.6,2945 C29.1 ; C29.1 4575,3050 4505,3120 4125.63,3120 C28.1 ; v1(4840,4670) 4855.98,4685.98 U1.2 4856,4786 4897.5,4827.5 ; v1(4870,4140) R26.2 R27.1 ; R27.1 4984.37,4220 C6.2 ; v1(4974.09,5142.48) 4932.48,5142.48 4905,5115 4905,4835 4897.5,4827.5 ; C14.1 C13.1 5059.37,4008.74 C8.2 C7.2 C6.2 ; C4.2 C5.2 C6.2 ; R1.2 5105.6,4965.6 5040,4900 5040,4850 5015,4825 4976.6,4825 U1.44 4897.5,4827.5 ; C33.1 2615.63,2990 2715,2990 2775,3050 C27.1 ; C27.1 3350.63,3000 3535,3000 3585,3050 C28.1
  Bottom Layer w20: 3110.6,5199.4 3110.6,5109.4 3150,5070 3740,5070 GND.2 3985,4825 4260,4825 v1(4260,4837.01) ; v1(3904.18,4505) 3969.2,4440 4350,4440 4385,4475 v1(4385,4485) C37.1
  Bottom Layer w25: v1(1650,5185) 1662.05,5197.05 K1.3@1812.6,5197.05 ; C26.1 v1(1800.63,3733.59) 1800.63,3709.02 K8.3 ; C22.1 1805.63,2204.02 K16.3 ; K5.3@1813,4447.05 v1(1818.16,4496.03) C17.1 ; v1(2420,5200) 2422.95,5197.05 K2.3@2562.6,5197.05 ; v1(2490,3745) 2514.65,3745 K9.3@2562.6,3697.05 ; C36.1 C18.1 2562.6,4573.03 K6.3@2562.6,4447.05 ; C20.1 3217.32,5197.05 K3.3 ; C32.1 3300.63,2209.02 K18.3 ; C24.1 3300.63,3709.02 K10.3 ; C19.1 3305.63,4454.02 K7.3 ; C31.1 4060.63,2199.02 K19.3 ; C34.1 4750,2344.37 v1(4750,2295) 4750,2259.65 K20.3@4812.6,2197.05
  other v1: 1800.63,2992.25 4133.65,4071.45 3904.18,4505
VCC_I: F1.1 USB1.A4 USB1.A9 USB1.B4 USB1.B9 | length 527.6
  Bottom Layer w15: USB1.B9 4103,5113 4140,5150 4240,5150 4280.1,5109.9 USB1.B4 4280.12,4983.11 F1.1 4291.94,4994.93 USB1.A9
pads on no net: K1. K2. K3. K5. K6. K7. K8. K9. K10. K11. K12. K13. K14. K15. K16. K17. K18. K19. K20. LED8.2 SW2.6 SW2.7 U1.20 U1.21 U1.22 U1.26 U1.27 U1.28 U1.29 U1.30 U1.40 U1.41 U1.42 USB1. USB1.1 USB1.2 USB1.3 USB1.4 USB1.A5 USB1.A8 USB1.B5 USB1.B8

## Polygon pours and split planes (outlines as drawn)
GND on Top Layer (solid): 1500,5390 1505,5395 5360,5395 5365,5390 5365,1505 1500,1505 1505,1510 1515,1510
GND on Bottom Layer (solid): 1500,5395 1505,5400 5365,5400 5365,1500 1505,1500

## Keep-outs
Keep-Out Layer:
  lines w10: 1553.74,1652.48 ccw(c1632.48,1652.48) 1632.48,1573.74 ; 1553.74,5266.65 cw(c1632.48,5266.65) 1632.48,5345.39 ; 5246.65,1573.74 ccw(c5246.65,1652.48) 5325.39,1652.48 ; 5246.65,5345.39 cw(c5246.65,5266.65) 5325.39,5266.65

## Silkscreen, mask and mechanical layers (free items; w line width, h text height)
Top Overlay:
  circle w10: c4570,3840 r590.55
Bottom Overlay:
  text "K4" at 4435,3977.5 h45

## Text inside footprints (layer, text, board x,y; h text height)
GND: Document "12832" at 4361.1,4936.26 h80; Document "G" at 3931.1,4821.26 h80 r180; Document "V" at 3931.1,4921.26 h80 r180; Document "C" at 3931.1,5026.26 h80 r180; Document "D" at 3936.1,5131.26 h80 r180